# Altium PCB PCB.PcbDoc
Units mil, origin at the board's own origin, x right, y up, seen from the top; angles counter-clockwise.
Board outline 2362.2 x 1181.1 mil, 2 copper layers (Top Layer, Bottom Layer), stack 61.811 mil thick; 67 components, 40 nets, 187 pads, 218 vias.
Unrouted connection lines stored in the file: 60.
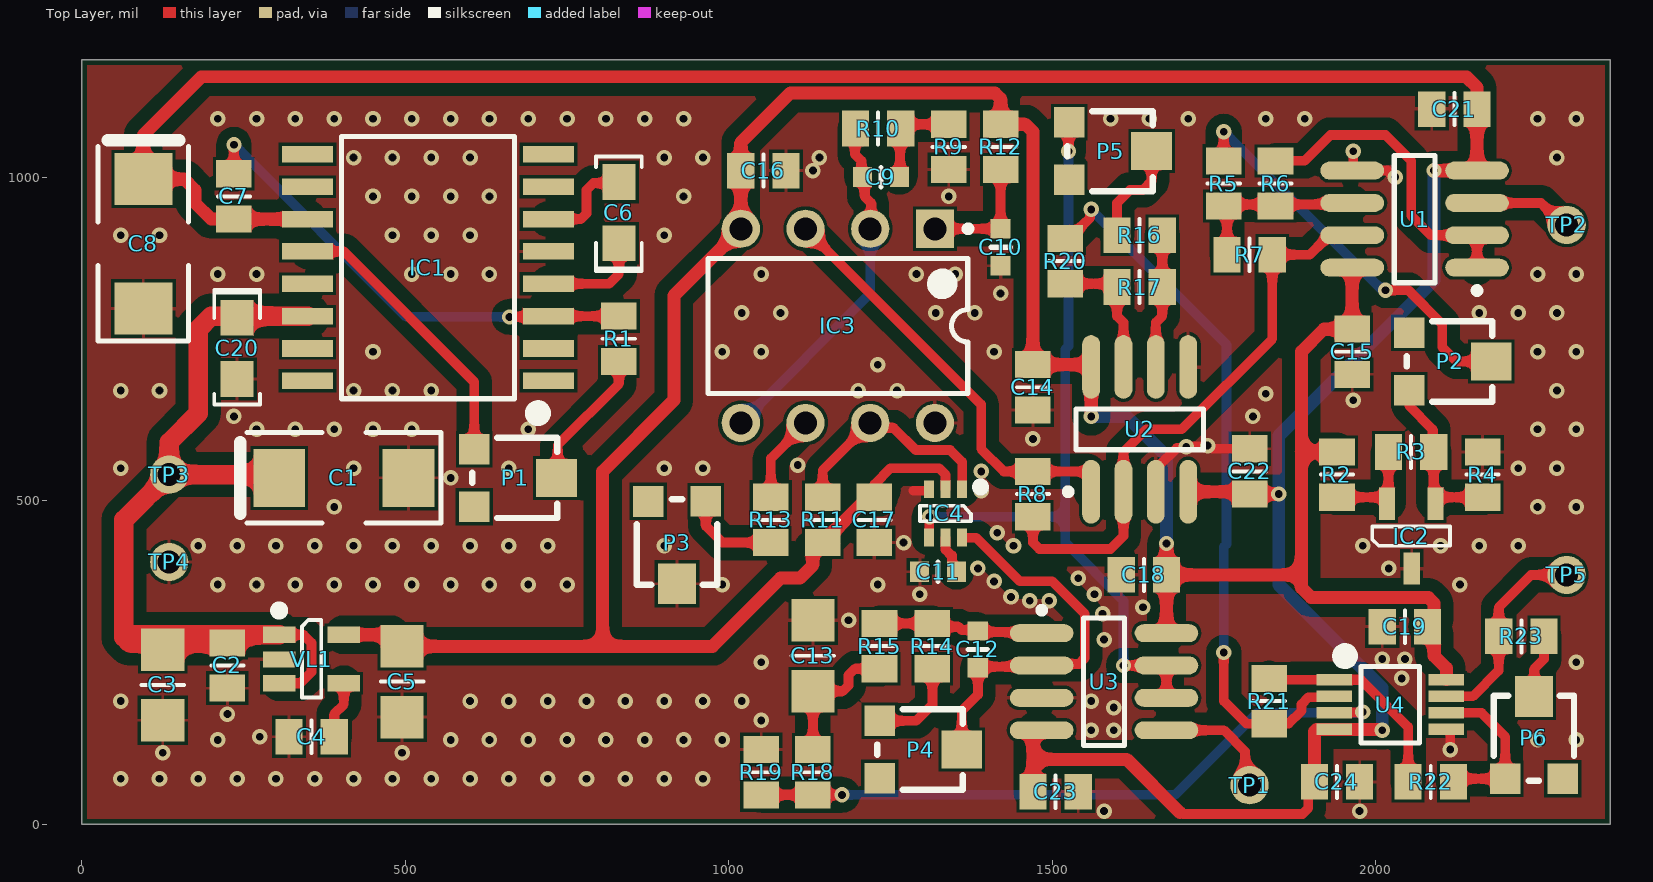
[diagram p0: Top Layer view]
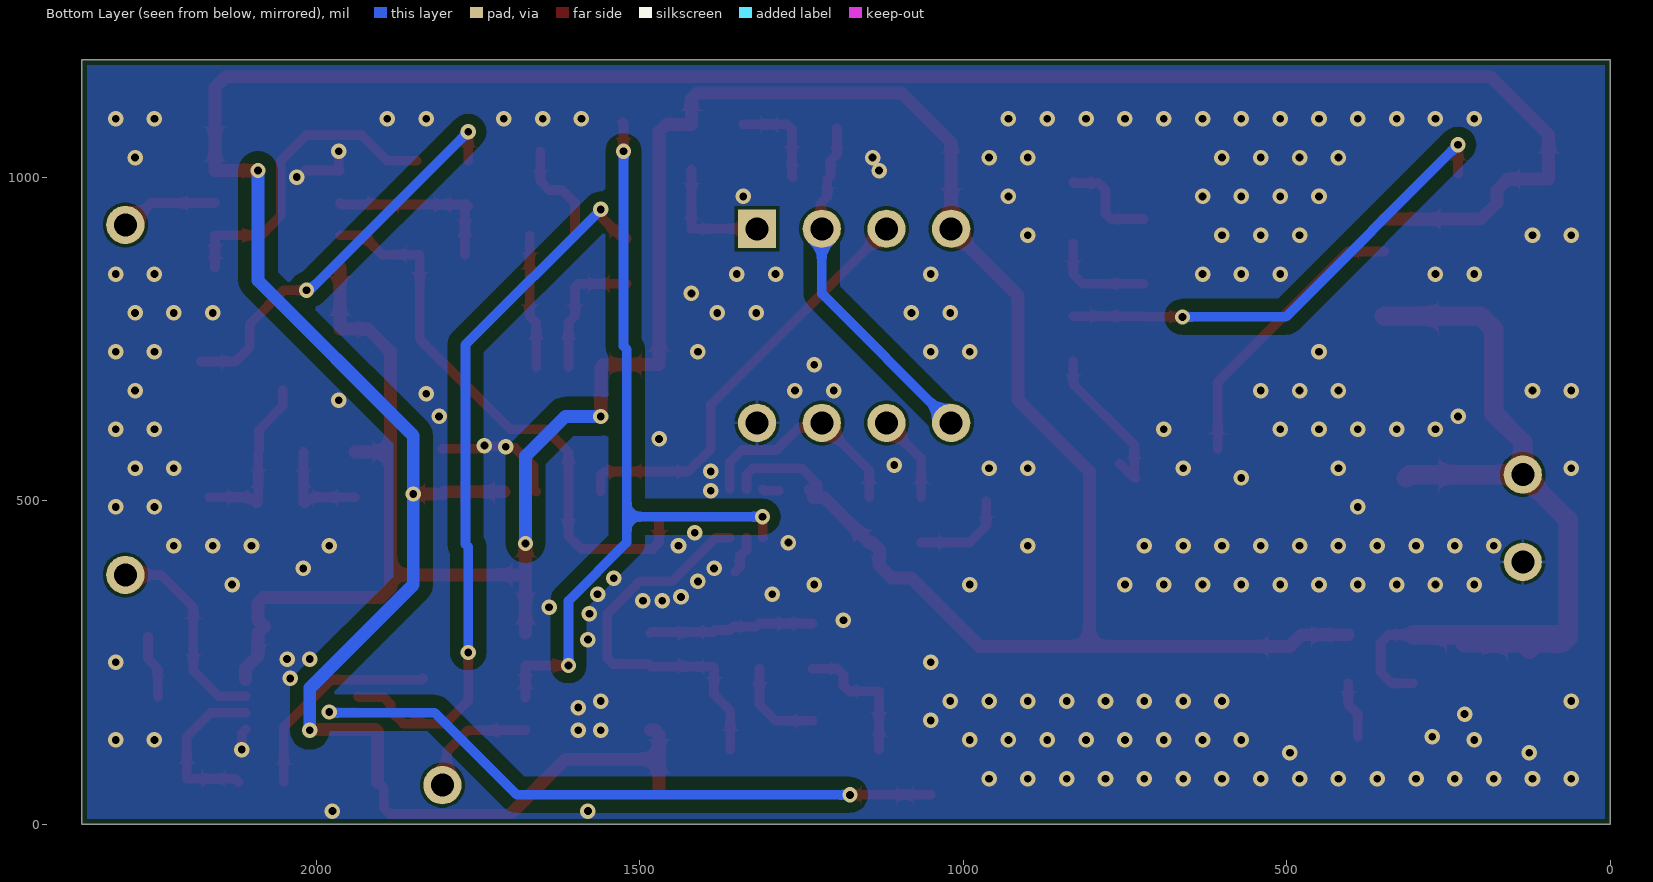
[diagram p1: Bottom Layer view, seen from below]
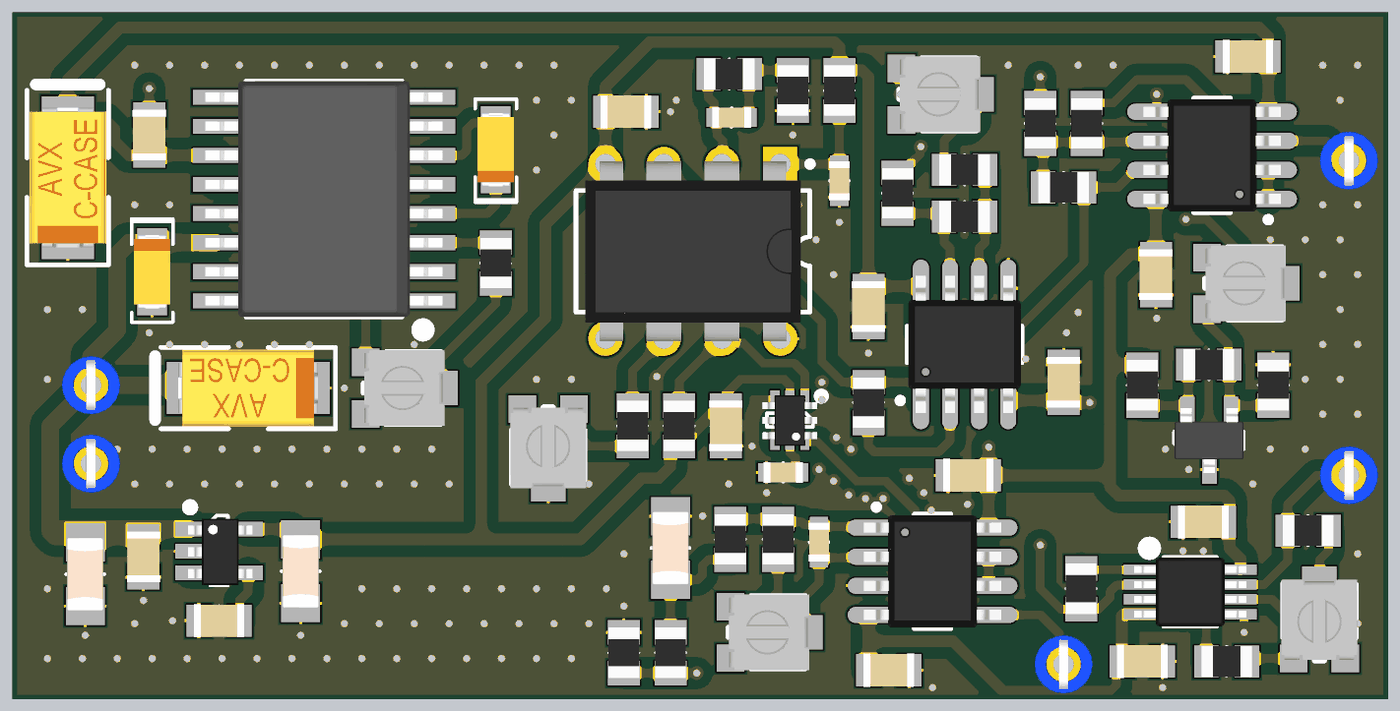
[diagram p2: 3D render of the assembled board from above, using the file's embedded part models]

## Layer stack, top to bottom
Top Solder: solder mask 0.5, Solder Resist, Dk 3.8
Top Layer: signal copper 1.378
Dielectric: core 59.0551, FR-4, Dk 4.5
Bottom Layer: signal copper 1.378
Bottom Solder: solder mask 0.5, Solder Resist, Dk 3.8

## Board outline
0,0 0,1181.1 2362.2,1181.1 2362.2,0

## Design rules (kind name [scope] priority, off if disabled: settings)
BoardOutlineClearance [All] p1: gap=7.87 ignorepadtopadclearanceinfootprint=FALSE
Clearance [All] p1: gap=5 ignorepadtopadclearanceinfootprint=FALSE except(9.84: Arc-Hole Track-Hole SMDPad-Hole THPad-Hole Via-Hole Fill-Hole Poly-Hole Region-Hole Text-Hole; 20: Arc-Fill Arc-Poly Arc-Region Track-Fill Track-Poly Track-Region)
ComponentClearance [All] p1: gap=5 collisioncheckmode=3 verticalgap=5 showdistances=TRUE
DiffPairsRouting [All] p1: maxlimit=10 minlimit=5 mostfreqgap=5 toplayer_minwidth=5 toplayer_maxwidth=1000 toplayer_prefwidth=5 bottomlayer_minwidth=5 bottomlayer_maxwidth=1000 bottomlayer_prefwidth=5 maxuncoupledlength=500
Height [All] p1: minheight=0 maxheight=71497.94 prefheight=500
HoleSize [All] p1: absolutevalues=TRUE maxlimit=248.03 minlimit=11.81 maxpercent=80.000 minpercent=20.000
HoleToHoleClearance [All] p1: gap=9.84 allowstackedmicrovias=FALSE
MinimumAnnularRing [All] p1: minimumring=3
MinimumSolderMaskSliver [All] p1: minsoldermaskwidth=0
PlaneClearance [All] p1: clearance=5
PlaneConnect PlaneConnectPowerPads [InPadClass('PowerPads')] p1: planeconnectstyle=Direct reliefexpansion=20 reliefentries=4 reliefconductorwidth=10 reliefairgap=10
PlaneConnect [All] p2: pad.planeconnectstyle=Relief pad.reliefexpansion=11.81 pad.reliefentries=4 pad.reliefconductorwidth=5 pad.reliefairgap=5 via.planeconnectstyle=Direct via.reliefexpansion=11.81 via.reliefentries=4 via.reliefconductorwidth=5 via.reliefairgap=5
PolygonConnect PolygonConnectPowerPads [InNetClass('PowerSuppy')] p1: connectstyle=Direct reliefconductorwidth=10 reliefentries=4 polygonreliefangle="90 Angle" airgapwidth=10
PolygonConnect [All] p2: thpad.connectstyle=Relief thpad.reliefconductorwidth=5 thpad.reliefentries=4 thpad.polygonreliefangle="90 Angle" thpad.airgapwidth=5 smdpad.connectstyle=Relief smdpad.reliefconductorwidth=5 smdpad.reliefentries=4 smdpad.polygonreliefangle="90 Angle" smdpad.airgapwidth=5 via.connectstyle=Direct via.reliefconductorwidth=5 via.reliefentries=4 via.polygonreliefangle="90 Angle" via.airgapwidth=5
RoutingVias [All] p1: holewidth=11.81 width=23.62 viastyle="Through Hole" minholewidth=11.81 minwidth=23.62 maxholewidth=23.62 maxwidth=259.84
SMDToCorner [All] p1: distance=0
SilkToSilkClearance [All] p1: silktosilkclearance=0
SilkToSolderMaskClearance [IsPad] p1: minsilkscreentomaskgap=5 clearancetoexposedcopper=TRUE
SolderMaskExpansion [All] p1: expansion=2.95 istentingtop=FALSE
SupplyNets "Schematic Supply Nets_4" [InNet('Vin')] p1: voltage=0.000
SupplyNets "Schematic Supply Nets_2" [InNet('4V')] p2: voltage=0.000
SupplyNets "Schematic Supply Nets_1" [InNet('-4V')] p3: voltage=0.000
SupplyNets "Schematic Supply Nets" [InNet('GND')] p4: voltage=0.000
Width [All] p1: maxlimit=1000 minlimit=5 preferedwidth=5 minimp=50.000000 maximp=50.000000 favimp=50.000000
20 further rules are at their usual default settings.

## Classes and differential pairs
component class Main: TP1 TP2 TP3 TP4 TP5
component class Correction: C19 C24 P5 P6 R16 R17 R18 R19 R20 R21 R22 R23 U4
component class SwitchIntegration: C11 C12 C13 C17 C18 C23 IC4 P4 R14 R15 U3
component class V/FC: C9 C10 C16 IC3 P3 R9 R10 R11 R12 R13
component class Ux: C14 C15 C21 C22 IC2 P2 R2 R3 R4 R5 R6 R7 R8 U1 U2
component class "Power Supply": C1 C2 C3 C4 C5 C6 C7 C8 C20 IC1 P1 R1 VL1

## Components (designator, comment, footprint, x,y, rotation, side; value= is the part's Value field where it differs from the comment)
C1 "CT_Taki_jak_da_Byczek_" CT_B_CASE_BIG 405,535 r180 top value=100uF
C2 "C_100nF_0805_C0G_25V_5" C_0805_2012 225,245 r270 top value=100nF
C3 "C_1uF_1206_X7R_25V_5" C_1206_3216 125,215 r270 top value=1uF
C4 "C_100nF_0805_C0G_25V_5" C_0805_2012 355,135 r180 top value=100nF
C5 "C_2.2uF_1206_X7R_25V_5" C_1206_3216 495,220 r270 top value=1uF
C6 "CT_10uF_16V_1206_10" CT_1206_3216 830,945 r90 top value=10uF
C7 "C_2.2nF_0805_16V_C0G_5" C_0805_2012 235,970 r90 top value=2nF
C8 "CT_Taki_jak_da_Byczek_" CT_B_CASE_BIG 95,896.85 r90 top value=100uF
C9 "C_10nF_0603_C0G_25V_5" C_0603_1608 1235,1000 r0 top value=10nF
C10 "C_1nF_0603_C0G_25V_5" C_0603_1608 1420,891.46 r270 top value=1nF
C11 "C_33nF_0603_C0G_25V_5" C_0603_1608 1323.54,390 r180 top value=33nF
C12 "C_220nF_0603_C0G_25V_5" C_0603_1608 1385,270 r90 top value=220nF
C13 "C_1uF_1206_X7R_25V_5" C_1206_3216 1130,260 r90 top value=1uF
C14 "C_100nF_0805_C0G_25V_5" C_0805_2012 1470,675 r270 top value=100nF
C15 "C_100nF_0805_C0G_25V_5" C_0805_2012 1963.54,730 r270 top value=100nF
C16 "C_100nF_0805_C0G_25V_5" C_0805_2012 1053.51,1010 r0 top value=100nF
C17 "C_100nF_0805_C0G_25V_5" C_0805_2012 1225,470 r270 top value=100nF
C18 "C_100nF_0805_C0G_25V_5" C_0805_2012 1641.46,385 r180 top value=100nF
C19 "C_100nF_0805_C0G_25V_5" C_0805_2012 2045,305 r180 top value=100nF
C20 "CT_10uF_16V_1206_10" CT_1206_3216 240,735 r270 top value=10uF
C21 "C_100nF_0805_C0G_25V_5" C_0805_2012 2121.46,1105 r180 top value=100nF
C22 "C_100nF_0805_C0G_25V_5" C_0805_2012 1805,545 r90 top value=100nF
C23 "C_100nF_0805_C0G_25V_5" C_0805_2012 1505,50 r0 top value=100nF
C24 "C_100nF_0805_C0G_25V_5" C_0805_2012 1940,65 r0 top value=100nF
IC1 "IC_LT1054" SOIC16 535,860 r180 top
IC2 "IC_TLV431" SOT23 2055,445 r0 top
IC3 "IC_LM331" DIP8 1168.51,770 r270 top
IC4 "IC_ADG779BKSZ" SC70 1335,480 r180 top
P1 "" Potentiometer#1 670,535 r270 top value=22k
P2 "POT" Potentiometer#1 2115,715 r270 top value=Value
P3 "POT" Potentiometer#2 920,435 r180 top value=20k
P4 "POT_1k" Potentiometer#1 1296.5,115 r270 top value=1k
P5 "POT" Potentiometer#1 1590,1040 r270 top value=20k
P6 "POT" Potentiometer#1 2244.36,133.57 r0 top value=20k
R1 "R_20k_0805_5" R_0805_2012 830,750 r90 top
R2 "R_1.5k_0805_5_1" R_0805_2012 1940,540 r270 top
R3 "R_10k_0805_5" R_0805_2012 2054.5,575 r0 top
R4 "R_10k_0805_5" R_0805_2012 2165,540 r90 top
R5 "R_27k_0805_5" R_0805_2012 1765,990 r270 top
R6 "R_33k_0805_5" R_0805_2012 1845,990 r270 top
R7 "R_33k_0805_5" R_0805_2012 1805,880 r0 top
R8 "R_33k_0805_5" R_0805_2012 1470,510 r90 top
R9 "R_47R_0805_5" R_0805_2012 1340,1046.5 r270 top
R10 "R_22k_0805_5" R_0805_2012 1230.85,1075 r0 top
R11 "R_10k_0805_5" R_0805_2012 1145,470 r90 top
R12 "R_6.8k_0805_5" R_0805_2012 1420,1046.5 r270 top
R13 "R_47k_0805_5" R_0805_2012 1065,470 r270 top
R14 "R_560R_0805_5" R_0805_2012 1314.72,275 r90 top
R15 "R_1k_0805_5" R_0805_2012 1232.93,275 r270 top
R16 "R_10k_0805_5" R_0805_2012 1635,910 r0 top
R17 "R_10k_0805_5" R_0805_2012 1635,830 r180 top
R18 "R_47k_0805_5" R_0805_2012 1130,80 r270 top
R19 "R_47k_0805_5" R_0805_2012 1050,80 r270 top
R20 "R_47k_0805_5" R_0805_2012 1520,870 r270 top
R21 "R_47k_0805_5" R_0805_2012 1835,190 r90 top
R22 "R_10k_0805_5" R_0805_2012 2085,65 r0 top
R23 "R_10k_0805_5" R_0805_2012 2225,290 r180 top
TP1 "Single pin" TP_1PIN 1805,60 r180 top value=-
TP2 "Single pin" TP_1PIN 2295,926.04 r0 top value=-
TP3 "Single pin" TP_1PIN 135,540 r180 top value=-
TP4 "Single pin" TP_1PIN 135,405 r180 top value=-
TP5 "Single pin" TP_1PIN 2295,385 r180 top value=-
U1 "A2_OPA2348" SO8 2060,935 r180 top value=OPA2348
U2 "A2_OPA2348" SO8 1635,610 r90 top value=OPA2348
U3 "A2_AD8034" SO8 1580,220 r0 top value=AD8034
U4 "A2_TLV2372IDGKR" VSSOP8 2022.41,184.54 r0 top value=TLV2372IDGKR
VL1 "LDO" SOT23-5 355,255 r270 top

## Footprints (in the part's own frame and the unit in brackets; to place one, negate y for a bottom-side part, rotate by r counter-clockwise, add the part's x,y. Pads: shape width x height; smd on the part's side, far side on the other; paste and mask are expansions set on the pad)
C_0603_1608 [mm]
  rect 0.75x0.8 smd: 1(-0.725,0) 2(0.725,0)
  silkscreen extent 0,-0.38 0,0.38, body extent -0.85,-0.45 0.85,0.45, height 0.89
C_0805_2012 [mil]
  rect 42x55 smd: 1(-35,0) 2(35,0)
  silkscreen extent 0,-25 0,25, body extent -43,-29 43,29, height 53
C_1206_3216 [mil]
  rect 65.63x66.81 smd: 1(-54.68,0) 2(54.69,0)
  silkscreen extent 0,-33 0,33, body extent -63,-31 63,31, height 32
CT_1206_3216 [mm]
  rect 1.4x1.3 smd: 1(-1.2,0) 2(1.2,0)
  silkscreen extent -2.3,-0.9 2.2,0.9, body extent -1.6,-0.8 1.6,0.8, height 1.81
CT_B_CASE_BIG [mm]
  rect 2.03x2.28 smd: 1(2.54,0) 2(-2.54,0)
  silkscreen extent -3.81,-1.78 4.06,1.78, body extent -3.05,-1.67 3.05,1.68, height 2.7
DIP8 [mm]
  rect 1.5x1.5 hole 0.9: 1(-3.81,3.81)
  round 1.5 hole 0.9: 2(-3.81,1.27) 3(-3.81,-1.27) 4(-3.81,-3.81) 5(3.81,-3.81) 6(3.81,-1.27) 7(3.81,1.27) 8(3.81,3.81)
  silkscreen extent -3.93,-5.1 2.65,5.24, body extent -3.94,-4.7 3.93,4.7, height 4.36
Potentiometer#1 [mil]
  rect 47.2x47.2 smd: 1(44.3,-63.5) 3(-44.36,-63.57)
  rect 59x63 smd: 2(0,63.5)
  silkscreen extent -62,-67 62,65, body extent -65,-66 65,72, height 83
Potentiometer#2 [mil]
  rect 47.2x47.2 smd: 1(-44.36,-63.57) 3(44.3,-63.5)
  rect 59x63 smd: 2(0,63.5)
  silkscreen extent -62,-67 62,65, body extent -65,-66 65,72, height 83
R_0805_2012 [mil]
  rect 42x55 smd: 1(-35,0) 2(35,0)
  silkscreen extent 0,-25 0,25, body extent -43,-27 43,27, height 27
SC70 [mm]
  rect 0.4x0.7 smd: 1(-0.65,-0.95) 2(0,-0.95) 3(0.65,-0.95) 4(-0.65,0.95) 5(0,0.95) 6(0.65,0.95)
  silkscreen extent -1.45,-1.12 1,0.3, body extent -1.1,-1.18 1.1,1.22, height 1.1
SO8 [mm]
  oval 2.5x0.7 smd: 1(-2.45,1.905) 2(-2.45,0.635) 3(-2.45,-0.635) 4(-2.45,-1.905) 5(2.45,-1.905) 6(2.45,-0.635) 7(2.45,0.635) 8(2.45,1.905)
  silkscreen extent -2.57,-2.5 0.8,2.93, body extent -3,-2.45 3,2.45, height 1.7
SOIC16 [mm]
  rect 2x0.65 smd: 1(-4.725,4.445) 2(-4.725,3.175) 3(-4.725,1.905) 4(-4.725,0.635) 5(-4.725,-0.635) 6(-4.725,-1.905) 7(-4.725,-3.175) 8(-4.725,-4.445) 9(4.725,-4.445) 10(4.725,-3.175) 11(4.725,-1.905) 12(4.725,-0.635) 13(4.725,0.635) 14(4.725,1.905) 15(4.725,3.175) 16(4.725,4.445)
  silkscreen extent -4.57,-5.15 3.4,5.97, body extent -5.17,-5.15 5.17,5.15, height 2.59
SOT23 [mil]
  rect 25x50 smd: 1(37.5,50) 2(-37.5,50) 3(0.5,-50)
  silkscreen extent -61,-15 60,15, body extent -59,-56 59,56, height 47
SOT23-5 [mil]
  rect 25x50 smd: 1(-37.5,-50) 2(0.5,-50) 3(37.5,-50) 4(37.5,50) 5(-37.5,50)
  silkscreen extent -79,-54 60,15, body extent -56,-53 59,57, height 57
TP_1PIN [mm] "Testpoint; 1 Pin;"
  round 1.5 hole 0.9: 1(0,0)
  body extent -1.27,-1.27 1.27,1.27, height 4.89
VSSOP8 [mm]
  rect 1.4x0.45 smd: 1(-2.2,0.975) 2(-2.2,0.325) 3(-2.2,-0.325) 4(-2.2,-0.975) 5(2.2,-0.975) 6(2.2,-0.325) 7(2.2,0.325) 8(2.2,0.975)
  silkscreen extent -2.03,-1.5 1.15,2.16, body extent -2.45,-1.5 2.45,1.5, height 1.1

## Part data
C1 C6 C8 C20: "Capacitor", Voltage=16V
  C1 C8: SCH_Footprint=B
  C6 C20: SCH_Footprint=1206
C2 C4 C9 C10 C11 C12 C14 C15 C16 C17 C18 C19 C21 C22 C23 C24: "Capacitor", Dielectric=C0G, Voltage=25V
  C2 C4 C14 C15 C16 C17 C18 C19 C21 C22 C23 C24: SCH_Footprint=0805
  C9 C10 C11 C12: SCH_Footprint=0603
C3 C5 C13: "Capacitor", Dielectric=X7R, Voltage=25V
  C3 C5: SCH_Footprint=1206
  C13: SCH_Footprint=0603
C7: "Capacitor", Dielectric=C0G, Voltage=16V, SCH_Footprint=0805
P1: library part R, SCH_Footprint=3224W
R1 R10: Resistance=20k, Tolerance=5, SCH_Footprint=0805
R2: Resistance=1.5k, Tolerance=5, SCH_Footprint=0805
R3 R4 R11 R16 R17 R22 R23: Resistance=10k, Tolerance=5, SCH_Footprint=0805
R5: Resistance=27k, Tolerance=5, SCH_Footprint=0805
R6 R7 R8: Resistance=33k, Tolerance=5, SCH_Footprint=0805
R9: Resistance=47R, Tolerance=5, SCH_Footprint=0805
R12: Resistance=6.8k, Tolerance=5, SCH_Footprint=0805
R13 R18 R19 R20 R21: Resistance=47k, Tolerance=5, SCH_Footprint=0805
R14: Resistance=560R, Tolerance=5, SCH_Footprint=0805
R15: Resistance=1k, Tolerance=5, SCH_Footprint=0805
TP1 TP2 TP3 TP4 TP5: library part TP_1PIN, "Testpoint", Manufacturer=-, HelpURL=-, Manufacturer Part Number=-, Part Number=TP_1PIN, SCH_Footprint=Single, Supplier 1=TME, Supplier 2="RS Components", Supplier 3=Farnell, Supplier 4=Mouser, Supplier 5=Digi-Key, Supplier 6=LCSC, Supplier 7=-, Supplier Part Number 7=-
VL1: library part VL_LP2985IM5-4.0, Iout=150mA, Vdrop=250mV, Vin max=16V, Vin min=2.5V, Vout=4V
P2 P3 P4 P5 P6: SCH_Footprint=3224W
U1 U2: SCH_Footprint=SO8
U3 U4: SCH_Footprint=SOIC8

## Via types
v1: diameter 24, hole 12, Top Layer to Bottom Layer, tented both sides, 202 vias
v2: diameter 23.62, hole 12, Top Layer to Bottom Layer, tented both sides, 16 vias

## Nets (pads, with @x,y where several pads share a name; then routed paths per layer and width w, separated by ;. In a path a pad name is that pad's centre, name@x,y a point inside that pad or via, vN(x,y) a via of type N, cw(c..) or ccw(c..) an arc to the next point about the centre after c; other vN are vias at no path point)
4V: C5.1 C14.1 C15.1 C16.1 C17.1 C18.1 C19.1 IC3.4 IC4.2 R2.1 R11.1 R12.1 U1.8 U2.8 U3.8 U4.8 VL1.5 | length 4634.1
  Top Layer w15: C17.1 1225,525 1250,550 1325,550 1335,540 IC4.2
  Top Layer w20: VL1.5 477.19,292.5 C5.1 805,274.69 ; C17.1@1231.5,505 C17.1 ; C17.1@1236,516 C17.1 ; v2(1560,630) U2.8 1556.46,710 C14.1 1470,1070 1458.5,1081.5 R12.1 1420,1121.21 1411.21,1130 1095,1130 1018.51,1053.51 C16.1 IC3.4 915,816.49 915,655 805,545 805,274.69 ; U3.8 C18.1 ; v2(1676.46,433.54) C18.1 ; R2.1 1885,575 ; U1.8 C15.1 1920,765 1885,730 1885,575 ; U4.8 2109.03,240.97 2090,260 2090,295 C19.1 2090,315 2090,341.21 2081.21,350 1900,350 1885,365 1885,385 ; 805,274.69 974.69,274.69 1080,380 1110,380 1129.54,399.54 1129.54,424 1140.54,435 R11.1 1215,505 C17.1 ; C18.1 1885,385 ; 1885,385 1885,575
  Bottom Layer w20: v2(1560,630) 1615,630 1676.46,568.54 v2(1676.46,433.54)
-4V: C7.1 C8.1 C21.1 C22.1 C23.1 C24.1 IC1.11 U1.4 U2.4 U3.4 U4.4 | length 4618.1
  Top Layer w15: 1700,17.87 1702.5,15.37 1886.73,15.37 1895.52,24.16 1895.52,55.52 C24.1
  Top Layer w20: IC1.11 C7.1 200,935 175,960 175,980 158.15,996.85 C8.1 95,1065 185,1155 2140,1155 2156.46,1138.54 C21.1 U1.4 v2(2090,1010) ; C23.1 1470,100 ; U3.4 1475.8,145 1470,139.2 1470,100 ; 1697.13,17.87 1615,100 1470,100 ; U2.4 1801.46,513.54 C22.1 ; C22.1@1815,510 v2(1850,510) ; C24.1 1905,142.91 1908.24,146.15 U4.4 2007.87,146.15 2009.02,145 v2(2010,145)
  Bottom Layer w20: v2(2010,145) 2010,210 1850,370 v2(1850,510) 1850,600 2090,840 v2(2090,1010)
GND: C1.2 C2.2 C3.2 C4.2 C5.2 C8.2 C10.2 C11.2 C13.2 C14.2 C15.2 C16.2 C17.2 C18.2 C19.2 C20.2 C21.2 C22.2 C23.2 C24.2 IC1.5 IC2.3 IC3.8 IC4.3 P3.2 R4.2 R9.2 R19.1 TP4.1 U1.5 U2.3 U2.5 U3.3 U4.5 VL1.2 | length 357.7
  Top Layer w15: 1285,515 1307.01,515 IC4.3 ; U2.3 1664.1,517.65 1664.1,553.08 1692.51,581.49 1705.46,581.49 1708.08,584.1 1739.1,584.1 v1(1740,585) 1742.44,585 1747.44,580 C22.2 ; v1(1965,1040) 1965,1011.46 U1.5 2017.56,1010 2027.56,1000 v1(2030,1000) ; U4.5 2115,140.18 v1(2115,115)
  other v1: 1580,20 1975,20 60,70 120,70 180,70 240,70 300,70 360,70 420,70 480,70 540,70 600,70 660,70 720,70 780,70 840,70 900,70 960,70 125,110 495,110 210,130 570,130 630,130 690,130 750,130 810,130 870,130 930,130 990,130 2250,130 2310,130 275,135 1560,145 1595,145 1050,160 225,170 1595,180 60,190 600,190 660,190 720,190 780,190 840,190 900,190 960,190 1020,190 1560,190 2040,225 1050,250 2310,250 2010,255 2045,255 1580,285 1185,315 1577.74,325 1640,335 1465,345 1495,345 1436.13,350.98 1295,355 1565,355 210,370 270,370 330,370 390,370 450,370 510,370 570,370 630,370 690,370 750,370 990,370 1230,370 2130,370 1410,375 1540,380 1385,395 2020,395 180,430 240,430 300,430 360,430 420,430 480,430 540,430 600,430 660,430 720,430 900,430 1440,430 1980,430 2100,430 2160,430 2220,430 1270,435 1415,450 390,490 2250,490 2310,490 1390,515 570,535 1390,545 60,550 420,550 660,550 900,550 960,550 2220,550 2280,550 1106.61,554.72 1707.18,583.21 1470,595.15 270,610 330,610 390,610 450,610 510,610 690,610 2250,610 2310,610 235,630 1810,630 1965,655 1830,665 60,670 120,670 420,670 480,670 540,670 1200,670 1260,670 2280,670 1230,710 450,730 990,730 1050,730 1410,730 2250,730 2310,730 1020,790 1080,790 1320,790 1380,790 2160,790 2220,790 2280,790 1420,820 210,850 270,850 510,850 570,850 630,850 1050,850 1290,850 1350,850 2250,850 2310,850 60,910 120,910 480,910 540,910 600,910 900,910 450,970 510,970 570,970 630,970 930,970 1340,970 1130,1010 420,1030 480,1030 540,1030 600,1030 900,1030 960,1030 1140,1030 2280,1030 210,1090 270,1090 330,1090 390,1090 450,1090 510,1090 570,1090 630,1090 690,1090 750,1090 810,1090 870,1090 930,1090 1590,1090 1650,1090 1710,1090 1830,1090 1890,1090 2250,1090 2310,1090
NetC4_1: C4.1 VL1.4 | length 88.7
  Top Layer w15: C4.1 390,170 405,185 VL1.4
NetC6_1: C6.1 IC1.4 | length 162.9
  Top Layer w15: IC1.4 815,835 830,850 C6.1
NetC6_2: C6.2 IC1.6 | length 153.9
  Top Layer w15: IC1.6 771.21,935 780,943.79 780,980 790.7,990.7 828.45,990.7 C6.2
NetC7_2: C7.2 IC1.3 R1.2 | length 750.7
  Top Layer w15: C7.2 v2(235,1050) ; v2(661.04,783.81) 719.84,783.81 IC1.3 R1.2
  Bottom Layer w15: v2(235,1050) 501.19,783.81 v2(661.04,783.81)
NetC9_1: C9.1 IC3.2 IC3.5 R10.1 | length 549.2
  Top Layer w15: R10.1 1195,1074.15 1195,1035 1205,1025 1205,1001.46 C9.1 1210,996.46 1210,970 1220,960 1220,921.49 IC3.2
  Bottom Layer w15: IC3.5 1218.51,820 IC3.2
NetC9_2: C9.2 R9.1 R10.2 | length 152.8
  Top Layer w15: C9.2 1264.7,1001.15 1264.7,1073.85 R10.2 1272.35,1081.5 R9.1
NetC10_1: C10.1 IC3.1 R12.2 | length 193
  Top Layer w15: IC3.1 C10.1 R12.2
NetC11_1: C11.1 IC4.5 | length 60.8
  Top Layer w15: IC4.5@1335.37,442.22 IC4.5 1335,423.96 1343.79,415.18 1344.82,415.18 1344.82,397.26 C11.1
NetC12_1: C12.1 IC4.4 P4.2 U3.2 | length 614.8
  Top Layer w15: P4.2 1360,175 1385,200 C12.1 1386.77,243.23 1481.77,243.23 U3.2 1485.95,247.4 1541.21,247.4 1550,256.19 1550,325 1500,375 1450,375 1382.4,442.6 IC4.4
NetC12_2: C12.2 R14.2 R15.1 U3.1 | length 256.8
  Top Layer w15: R15.1 R14.2 1319.72,305 1355,305 1360,300 1383.54,300 C12.2 1386.77,296.77 1481.77,296.77 U3.1
NetC13_1: C13.1 R15.2 R18.1 | length 216.9
  Top Layer w15: R18.1 C13.1 1176.21,205.31 1185,214.1 1185,230 1195,240 R15.2
NetIC1_12: IC1.12 P1.3 | length 445.1
  Top Layer w15: IC1.12 405,885 606.43,683.57 P1.3
NetIC2_1: IC2.1 P2.1 R3.2 R4.1 | length 269.3
  Top Layer w15: P2.1 2051.5,646.5 2088,610 2088,576.5 R3.2 2089.5,498 IC2.1 2102.5,505 R4.1
NetIC2_2: IC2.2 R2.2 R3.1 | length 162.5
  Top Layer w15: R2.2 2007.5,505 IC2.2 2019.5,497 R3.1
NetIC3_3: IC3.3 R8.2 U2.1 | length 665
  Top Layer w15: IC3.3 1390,648.51 1390,580 1425,545 1554.2,545 1560,539.2 U2.1
NetIC3_6: IC3.6 R13.1 | length 137.2
  Top Layer w15: R13.1 1065,565 1118.51,618.51 IC3.6
NetIC3_7: IC3.7 IC4.1 R11.2 | length 353.8
  Top Layer w15: R11.2 1145,546.49 IC3.7 ; IC3.7@1219.33,620 1226.93,612.4 1254.49,612.4 1288.92,577.97 1342.03,577.97 1360.59,559.41 IC4.1
NetP1_2: P1.2 R1.1 | length 252.3
  Top Layer w15: P1.2 P1.2@735.5,535 ; P1.2@757.5,557 P1.2@735.5,535 ; R1.1 830,680 735.5,585.5 P1.2@735.5,535
NetP2_2: P2.2 R5.1 | length 626.4
  Top Layer w15: R5.1 v2(1765,1070) ; v2(2015,825) 2050.67,825 2102.6,773.07 2102.6,737.4 2125,715 P2.2
  Bottom Layer w15: v2(1765,1070) 1767.82,1067.18 2008.35,826.65 2013.35,826.65 v2(2015,825)
NetP3_1: P3.1 R13.2 | length 149.2
  Top Layer w15: P3.1 964.36,460.64 990,435 R13.2
NetP4_3: P4.3 R14.1 | length 147.6
  Top Layer w15: P4.3 1289.36,159.36 1314.72,184.72 R14.1
NetP5_2: P5.2 R16.1 | length 163.9
  Top Layer w15: R16.1 1600,960 1620,980 1640,980 1653.5,993.5 P5.2
NetP6_2: P6.2 R23.1 | length 99.4
  Top Layer w15: P6.2 2245,197.71 2245,240 2260,255 R23.1
NetP6_3: P6.3 R22.2 U4.6 | length 253.3
  Top Layer w15: U4.6 2163.26,171.74 2200,135 P6.3 2125,70 R22.2
NetR5_2: R5.2 R6.2 R7.1 U1.6 | length 277.7
  Top Layer w15: R7.1 1770,950 R5.2 1767.6,957.6 1961.14,957.6 U1.6
NetR6_1: R6.1 U1.1 U1.2 | length 492
  Top Layer w15: R6.1 1890,1025 1930,1065 2015,1065 2055,1025 2055,940 2085,910 U1.2 U1.1
NetR7_2: R7.2 R8.1 U1.7 U2.2 | length 890.9
  Top Layer w15: R8.1 1470,435 1480,425 1590,425 1610,445 U2.2 1610,575 1645,610 1700,610 1840,750 R7.2 1898.11,880 1928.11,910 U1.7
NetR16_2: R16.2 R17.1 U2.6 | length 207.7
  Top Layer w15: U2.6 1660,775 1670,785 R17.1 R16.2
NetR17_2: R17.2 R20.2 U2.7 | length 209.8
  Top Layer w15: R20.2 1595,835 R17.2 1600,785 1610,775 U2.7
NetR18_2: R18.2 R19.2 U4.3 | length 1027.7
  Top Layer w15: R19.2 R18.2 v2(1175,45) ; U4.3 1936.41,172.35 1979.39,172.35 v2(1980,172.96)
  Bottom Layer w15: v2(1175,45) 1690,45 1816.74,171.74 1978.78,171.74 v2(1980,172.96)
NetR20_1: R20.1 R21.1 U4.2 | length 1141.5
  Top Layer w15: R20.1 1526.5,905 1558.35,936.85 1558.35,948.35 v2(1560,950) ; v2(1765,265) 1765,190 1800,155 R21.1 ; R21.1@1848.5,168.5 R21.1 ; U4.2 1934.44,195.97 1895.97,195.97 1885,185 1885,175 1865,155 R21.1
  Bottom Layer w15: v2(1560,950) 1769.18,740.82 1769.18,432.43 1765,428.26 v2(1765,265)
NetR21_2: R21.2 R22.1 U4.1 | length 331.1
  Top Layer w15: R21.2 1837.08,222.92 U4.1 1977.08,222.92 2050,150 R22.1
NetR23_2: R23.2 TP5.1 U4.7 | length 320.9
  Top Layer w15: U4.7 2150,197.33 2190,237.33 R23.2 2190,335 2240,385 TP5.1
NetTP1_1: TP1.1 U3.5 | length 190.1
  Top Layer w15: U3.5 1765,145 1797.97,112.03 1797.97,67.03 TP1.1
NetTP2_1: TP2.1 U1.3 | length 152.6
  Top Layer w15: U1.3 2255.39,960 2289.35,926.04 TP2.1
UY: IC4.6 P5.3 U3.6 U3.7 | length 1238.4
  Top Layer w15: IC4.6 1310,443.19 v2(1310,475) ; v2(1525,1040) 1525,1082.93 P5.3 ; v2(1610,245) U3.7 U3.6
  Bottom Layer w15: v2(1310,475) 1520,475 ; v2(1525,1040) 1525,738.83 1520,733.83 1520,475 ; v2(1610,245) 1610,345 1520,435 1520,475
Vin: C1.1 C2.1 C3.1 C20.1 IC1.14 TP3.1 VL1.1 VL1.3 | length 1618
  Top Layer w15: VL1.3 337.5,217.5 355,235 355,280 342.5,292.5 VL1.1
  Top Layer w30: VL1.1 68.71,292.5 65,288.79 ; C1.1@315,535 310,540 TP3.1 ; IC1.14 200,785 180,765 180,635 135,590 TP3.1 ; 65,288.79 216.21,288.79 C2.1 135.31,280 C3.1 114.69,280 73.79,280 65,288.79 ; 65,288.79 65,470 TP3.1
pads on no net: IC1.1 IC1.2 IC1.7 IC1.8 IC1.9 IC1.10 IC1.13 IC1.15 IC1.16 P1.1 P2.3 P3.3 P4.1 P5.1 P6.1

## Polygon pours and split planes (outlines as drawn)
GND on Bottom Layer "GND_L02_P001" (solid, remove dead copper, pour order 1): 0,0 0,1181.1 2362.2,1181.1 2362.2,0
GND on Top Layer "GND_L01_P000" (solid, remove dead copper, pour order 0): 0,0 0,1181.1 2362.2,1181.1 2362.2,0

## Silkscreen, mask and mechanical layers (free items; w line width, h text height)
Mechanical 2:
  the board outline again, w5